# Altium PCB 6C-2L-1550um.PcbDoc
Units mm, origin at the board's own origin, x right, y up, seen from the top; angles counter-clockwise.
Board outline 100 x 40 mm, 2 copper layers (Top Layer, Bottom Layer), stack 1.586 mm thick; 5 components, 5 nets, 45 pads, 10 vias.
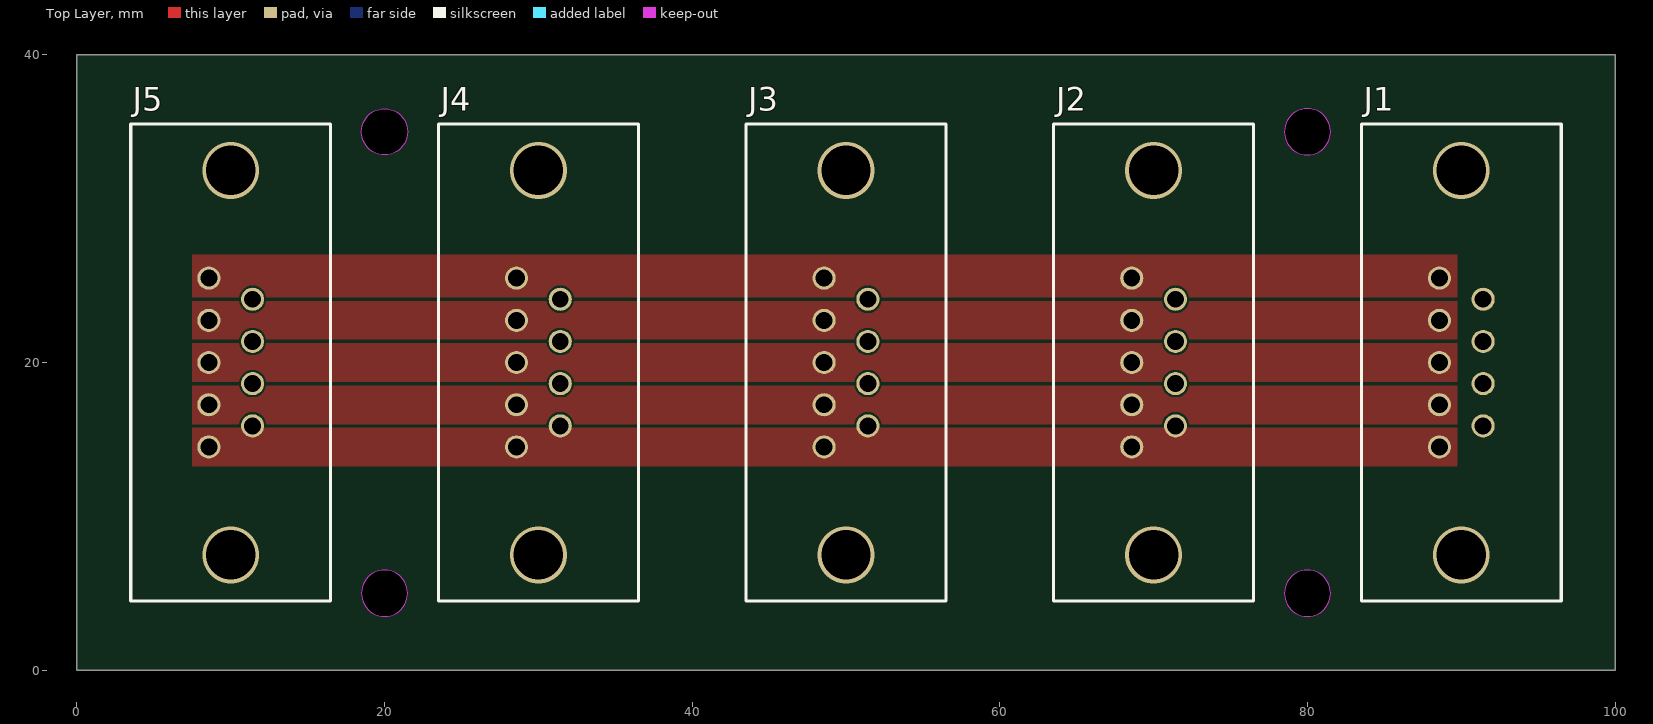
[diagram p0: Top Layer view]
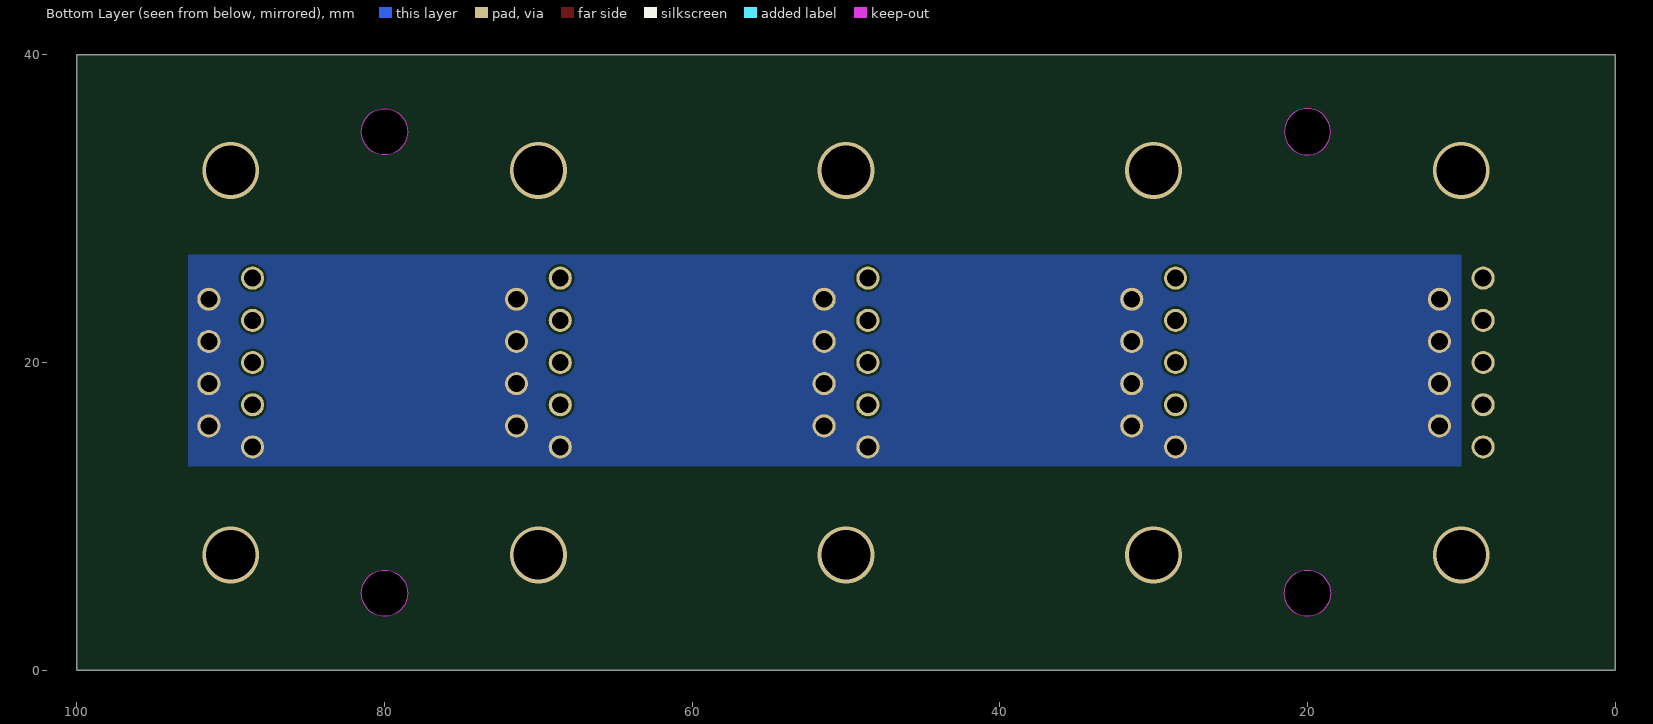
[diagram p1: Bottom Layer view, seen from below]
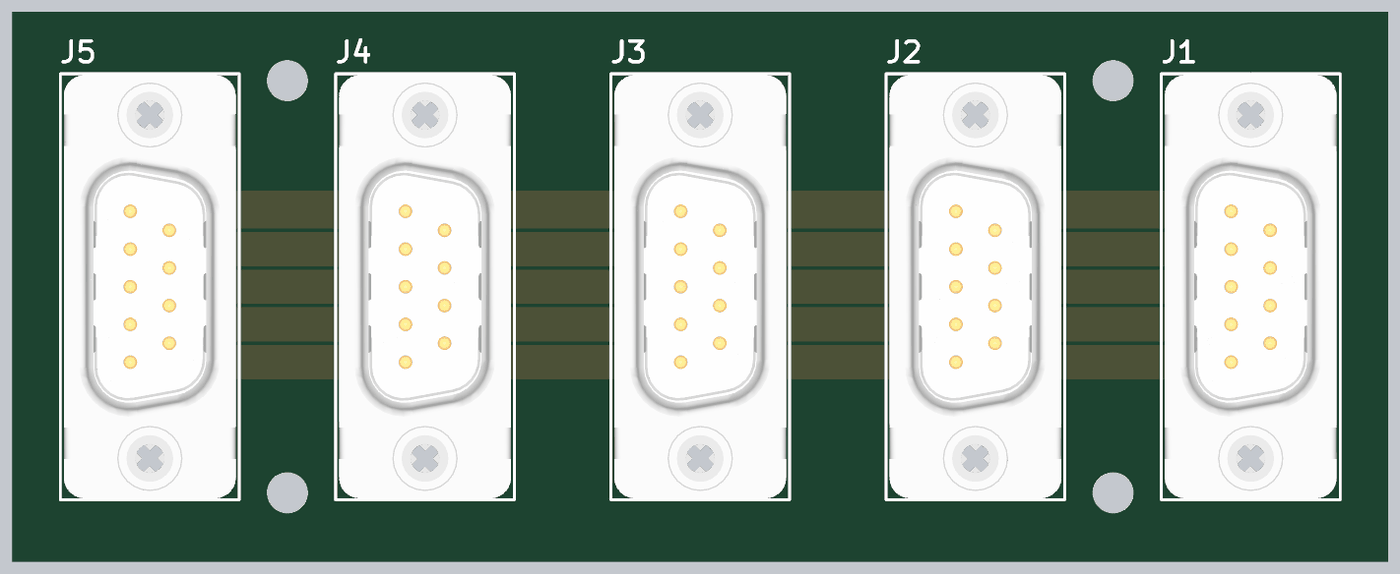
[diagram p2: 3D render of the assembled board from above, using the file's embedded part models]

## Layer stack, top to bottom
Top Solder: solder mask 0.0102, Solder Resist, Dk 3.5
Top Layer: signal copper 0.018
Dielectric1: core 1.55, FR-4, Dk 4.8
Bottom Layer: signal copper 0.018
Bottom Solder: solder mask 0.0102, Solder Resist, Dk 3.5

## Board outline
0,0 0,40 100,40 100,0
cut-out: 78.5,5 ccw(c80,5) 80,3.5 ccw(c80,5) 81.5,5 ccw(c80,5) 80,6.5 ccw(c80,5)
cut-out: 78.5,35 ccw(c80,35) 80,33.5 ccw(c80,35) 81.5,35 ccw(c80,35) 80,36.5 ccw(c80,35)
cut-out: 18.5,5 ccw(c20,5) 20,3.5 ccw(c20,5) 21.5,5 ccw(c20,5) 20,6.5 ccw(c20,5)
cut-out: 20,33.5 cw(c20,35) 18.5,35 cw(c20,35) 20,36.5 cw(c20,35) 21.5,35 cw(c20,35)

## Design rules (kind name [scope] priority, off if disabled: settings)
BoardOutlineClearance [All] p1: gap=0.25 ignorepadtopadclearanceinfootprint=FALSE except(0: Arc-SplitContinuation Track-SplitContinuation SMDPad-SplitContinuation THPad-SplitContinuation Via-SplitContinuation Fill-SplitContinuation Poly-SplitContinuation Region-SplitContinuation Text-SplitContinuation)
Clearance Clearance-xPP-xTP-xTT [All] p1: gap=0.15 ignorepadtopadclearanceinfootprint=FALSE except(0: Arc-Hole Track-Hole SMDPad-Hole THPad-Hole Via-Hole Fill-Hole Poly-Hole Region-Hole Text-Hole)
ComponentClearance [All] p1: gap=0.25 collisioncheckmode=3 verticalgap=0.25 showdistances=FALSE
DiffPairsRouting [All] p1: maxlimit=0.25 minlimit=0.25 mostfreqgap=0.25 toplayer_minwidth=0.381 toplayer_maxwidth=0.381 toplayer_prefwidth=0.381 bottomlayer_minwidth=0.381 bottomlayer_maxwidth=0.381 bottomlayer_prefwidth=0.381 maxuncoupledlength=12.5
Height [All] p1: minheight=0 maxheight=25 prefheight=12.5
HoleSize HoleSize-PTH [All] p1: absolutevalues=TRUE maxlimit=2 minlimit=0.25 maxpercent=80.000 minpercent=20.000
HoleToHoleClearance [All] p1: gap=0.35 allowstackedmicrovias=TRUE
MinimumAnnularRing "Minimum IAR  >0.45mm" [((ObjectKind = 'Pad') OR (ObjectKind = 'Via')) And (Layer = 'MultiLayer') And (HoleDiameter > AsMM(0.45))] p1: minimumring=0.175 // minimum inner annular ring for pads > 0.45mm finished hole size
MinimumAnnularRing "Minimum IAR <=0.45mm" [((ObjectKind = 'Pad') OR (ObjectKind = 'Via')) And (Layer = 'MultiLayer') And (HoleDiameter <= AsMM(0.45))] p2: minimumring=0.175 // minimum inner annular ring for pads <= 0.45mm finished hole size
MinimumSolderMaskSliver [All] p1: minsoldermaskwidth=0.08
PlaneClearance PlaneClearance-IPI [All] p1: clearance=0.25
PlaneConnect [All] p1: planeconnectstyle=Relief reliefexpansion=0.175 reliefentries=4 reliefconductorwidth=0.2 reliefairgap=0.2
PolygonConnect PolygonConnect-xTW [All] p1: connectstyle=Direct reliefconductorwidth=0.2 reliefentries=4 polygonreliefangle="90 Angle" airgapwidth=0.2
RoomDefinition Schematic [InComponentClass('Schematic')] p1: confinementstyle=ConfineIn formatcopy=TRUE lockcomponents=FALSE outline -250,-250 -199.2,-250 -199.2,-224.6 -250,-224.6
RoutingCorners [All] p1: cornerstyle=45-Degree minsetback=2.5 maxsetback=2.5
RoutingVias "RoutingVias > 0.45mm" [(ObjectKind = 'Via') And (HoleDiameter > AsMM(0.45))] p1: holewidth=0.5 width=0.85 viastyle="Through Hole" minholewidth=0.5 minwidth=0.85 maxholewidth=0.9 maxwidth=1.25 // finishet hole size > 0.45mm
RoutingVias "RoutingVias <= 0.45mm" [(ObjectKind = 'Via') And (HoleDiameter <= AsMM(0.45))] p2: holewidth=0.3 width=0.65 viastyle="Through Hole" minholewidth=0.25 minwidth=0.6 maxholewidth=0.45 maxwidth=0.8 // finishet hole size <= 0.45mm
SilkToSilkClearance [All] p1: silktosilkclearance=0.2
SilkToSolderMaskClearance SilkscreenOverComponentPads [IsPad] p1: minsilkscreentomaskgap=0.2 clearancetoexposedcopper=TRUE
SolderMaskExpansion [All] p1: expansion=0 istentingtop=FALSE
UnRoutedNet [All] p1: checkbadconnections=TRUE
Width Width-xTW [All] p1: maxlimit=1.5 minlimit=0.15 preferedwidth=0.2
18 further rules are at their usual default settings.

## Components (designator, comment, footprint, x,y, rotation, side; value= is the part's Value field where it differs from the comment)
J1 "1x9 Header" D-SUB-9PIN-TE 90,20 r90 top
J2 "1x9 Header" D-SUB-9PIN-TE 70,20 r90 top
J3 "1x9 Header" D-SUB-9PIN-TE 50,20 r90 top
J4 "1x9 Header" D-SUB-9PIN-TE 30,20 r90 top
J5 "1x9 Header" D-SUB-9PIN-TE 10,20 r90 top

## Footprints (in the part's own frame and the unit in brackets; to place one, negate y for a bottom-side part, rotate by r counter-clockwise, add the part's x,y. Pads: shape width x height; smd on the part's side, far side on the other; paste and mask are expansions set on the pad)
D-SUB-9PIN-TE [mm]
  round 1.5 hole 1.1 mask+0: 1(5.486,1.422) 2(2.743,1.422) 3(0,1.422) 4(-2.743,1.422) 5(-5.486,1.422) 6(4.115,-1.422) 7(1.372,-1.422) 8(-1.372,-1.422) 9(-4.115,-1.422)
  silkscreen extent -15.5,-6.5 15.5,6.5, body extent -15.4,-6.25 15.4,6.25, height 13.5

## Via types
v1: diameter 3.7, hole 3.2, Top Layer to Bottom Layer, 10 vias

## Nets (pads, with @x,y where several pads share a name; then routed paths per layer and width w, separated by ;. In a path a pad name is that pad's centre, name@x,y a point inside that pad or via, vN(x,y) a via of type N, cw(c..) or ccw(c..) an arc to the next point about the centre after c; other vN are vias at no path point)
CF: J1.1 J2.1 J3.1 J4.1 J5.1
CS: J1.2 J2.2 J3.2 J4.2 J5.2
SHIELD: J1.5 J1.6 J1.7 J1.8 J1.9 J2.5 J2.6 J2.7 J2.8 J2.9 J3.5 J3.6 J3.7 J3.8 J3.9 J4.5 J4.6 J4.7 J4.8 J4.9 J5.5 J5.6 J5.7 J5.8 J5.9
WF: J1.3 J2.3 J3.3 J4.3 J5.3
WS: J1.4 J2.4 J3.4 J4.4 J5.4
copper on no net:
  other v1: 10,7.497 30,7.497 50,7.497 70,7.497 90,7.497 10,32.497 30,32.497 50,32.497 70,32.497 90,32.497

## Polygon pours and split planes (outlines as drawn)
SHIELD on Top Layer "NONET_L-01_P-001" (solid, pour order 5): 7.5,15.75 89.75,15.75 89.75,13.25 7.5,13.25
WS on Top Layer "NONET_L-01_P-001" (solid, pour order 4): 7.5,18.5 89.75,18.5 89.75,16 7.5,16
WF on Top Layer "NONET_L-01_P-001" (solid, pour order 3): 7.5,21.25 89.75,21.25 89.75,18.75 7.5,18.75
CS on Top Layer "NONET_L-01_P-001" (solid, pour order 1): 89.75,24 89.75,21.5 7.5,21.5 7.5,24
CF on Top Layer "NONET_L-01_P-001" (solid, pour order 0): 89.75,27 7.5,27 7.5,24.25 89.75,24.25
SHIELD on Bottom Layer "NONET_L-01_P-001" (solid, pour order 6): 92.75,27 92.75,13.25 10,13.25 10,27

## Silkscreen, mask and mechanical layers (free items; w line width, h text height)
Dimensions:
  circle w0.2: c80,35 r1.5
  circle w0.2: c80,5 r1.5
  circle w0.2: c20,5 r1.5
  circle w0.2: c20,35 r1.5
  lines w0.2: 0,0 100,0 100,40 0,40 0,0